# Allegro board ALTIROC2_EMULATOR_V2.brd
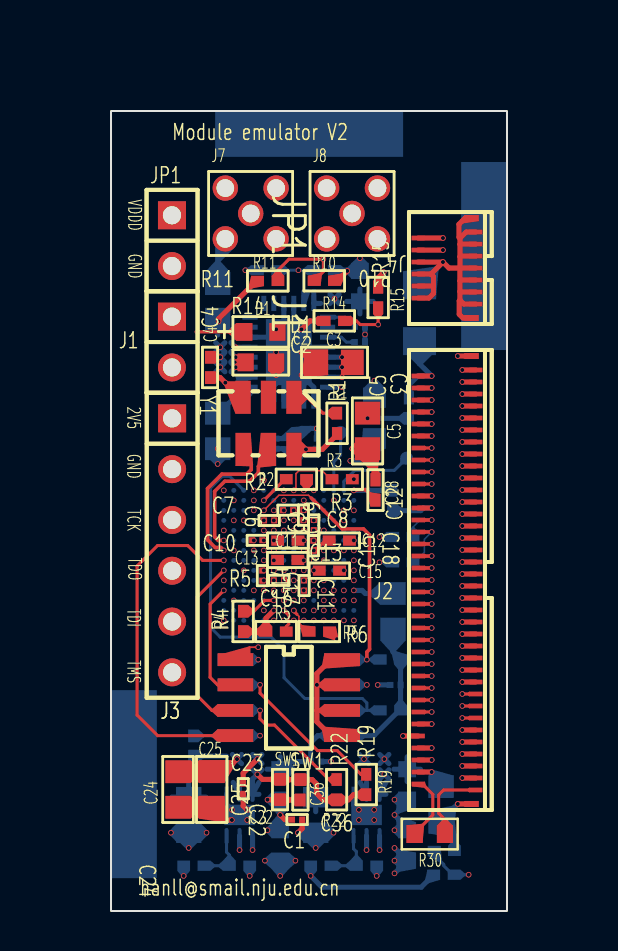
[diagram p0: board, top side]
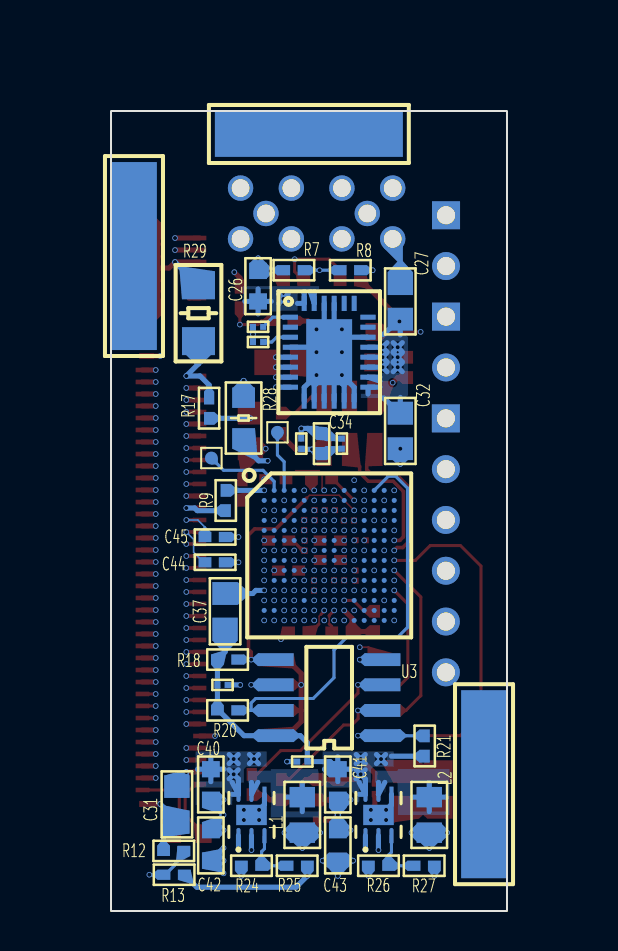
[diagram p1: board, bottom side, seen from below]

Outline 19.8 x 40 mm; copper layers: TOP, 02_GND, 03_SIG, 04_PWR, 05_PWR, 06_SIG, 07_GND, BOTTOM. Coordinates in mm from the lower left corner of the outline.
Outline path: rectangle 0,0 19.8,40

## Design rules (mm)
net group FAST_CMD: nets TIMING_DOUTN0 TIMING_DOUTP0
net group LPGBT_CK40: nets LPGBT_CK40N LPGBT_CK40P
net group LUMI0: nets FAST_CMDN FAST_CMDP
net group LUMI1: nets LUMI_DOUTN1 LUMI_DOUTP1
net group REFCLK: nets REFCLK_N REFCLK_P
net group TDR: nets TDR1 TDR2
net group TESTPIN: nets TESTPIN0 TESTPIN1
net group TIMING0: nets LUMI_DOUTN0 LUMI_DOUTP0
net group TIMING1: nets TIMING_DOUTN1 TIMING_DOUTP1
net group ASIC_ADD: nets ASIC_ADD<1> ASIC_ADD<2> ASIC_ADD<3>

## Placement (name value [footprint] x y rotation side)
C1  0.1u/0201  [SC0201]  9.3 4.57 180 top
C2  10u/0603  [SC0603]  7.49 27.43 180 top
C3  47u/0805  [SC0805]  11.18 27.43 180 top
C4  4.7u/0402  [SC0402]  4.95 27.18 90 top
C5  47u/0805  [SC0805]  12.83 24 90 top
C6  0.1u/0201  [SC0201]  8.85 20.04 180 top
C7  0.1u/0201  [SC0201]  7.91 19.53 0 top
C8  0.1u/0201  [SC0201]  9.62 19.79 90 top
C9  0.1u/0201  [SC0201]  10.14 19.3 90 top
C10  0.1u/0201  [SC0201]  7.31 18.54 180 top
C11  4.7u/0402  [SC0402]  8.84 18.52 0 top
C12  4.7u/0402  [SC0402]  11.41 18.52 180 top
C13  4.7u/0402  [SC0402]  8.83 17.55 0 top
C14  0.1u/0201  [SC0201]  7.56 16.77 90 top
C15  4.7u/0402  [SC0402]  10.92 17.02 180 top
C16  0.1u/0201  [SC0201]  8.39 16.54 180 top
C17  0.1u/0201  [SC0201]  9.65 16.27 270 top
C18  4.7u/0402  [SC0402]  13.23 21.04 90 top
C19  0.1u/0201  [SC0201]  10.12 18.26 90 top
C22  4.7u/0402  [SC0402]  8.45 6.07 90 top
C23  0.1u/0201  [SC0201]  6.61 6.11 270 top
C24  47u/0805  [SC0805]  3.35 6.08 270 top
C25  47u/0805  [SC0805]  5.04 6.08 270 top
C26  10u/0603  [SC0603]  12.45 31.24 270 bottom
C27  47u/0805  [SC0805]  5.33 30.48 90 bottom
C29  1n/0201  [SC0201]  12.45 29.21 180 bottom
C30  0.01u/0201  [SC0201]  12.45 28.45 180 bottom
C31  47u/0805  [SC0805]  16.5 5.33 270 bottom
C32  47u/0805  [SC0805]  5.33 24 270 bottom
C33  0.1u/0201  [SC0201]  10.29 23.37 270 bottom
C34  10u/0402  [SC0402]  9.27 23.37 270 bottom
C35  0.1u/0201  [SC0201]  8.26 23.37 90 bottom
C36  4.7u/0402  [SC0402]  9.47 6.06 90 top
C37  47u/0805  [SC0805]  14.1 14.99 270 bottom
C38  0.1u/0201  [SC0201]  14.22 11.3 0 bottom
C39  0.1u/0201  [SC0201]  10.24 7.47 0 bottom
C40  10u/0603  [SC0603]  14.81 6.33 90 bottom
C41  10u/0603  [SC0603]  8.46 6.33 90 bottom
C42  10u/0603  [SC0603]  14.81 3.28 270 bottom
C43  10u/0603  [SC0603]  8.46 3.28 270 bottom
C44  (0.01u/0402)  [SC0402]  14.59 17.43 180 bottom
C45  (0.01u/0402)  [SC0402]  14.59 18.7 180 bottom
D1  SML-310M/green0603  [SD0603-LED]  7.49 28.96 0 top
J1  2 HEADER  [SIP-2P]  3.05 25.91 270 top
J2  FH26W-71S-0.3SHW(60)  [FH26W-71S-UPDATE_ORIGIN]  16.8 16.55 180 top
J3  SIP6  [SIP-6P]  3.06 18.28 270 top
J4  FH26W-13S-0.3SHW(60)  [FH26W-13S-UPDATE_ORIGIN]  16.8 32.15 180 top
J5  -  [S1711-46R]  18.65 32.75 90 bottom
J6  -  [S1711-46R]  1.15 6.34 270 bottom
J7  (0734151471)  [MMCX5]  6.99 34.88 0 top
J8  (0734151471)  [MMCX5]  12.05 34.88 0 top
J9  -  [S1711-46R]  9.91 38.85 180 bottom
JP1  JUMPER2  [SIP-2P]  3.05 30.98 270 top
L1  BRC2012T2R2MD  [SL0805]  10.24 4.8 90 bottom
L2  BRC2012T2R2MD  [SL0805]  3.89 4.8 90 bottom
NOREF  -  []  16.8 20 90 top
NOREF#2  -  []  2.5 37 90 top
NOREF#3  -  []  16.8 16.55 90 top
NOREF#4  -  []  0 0 90 top
NOREF#5  -  []  0 40 0 top
NOREF#6  -  []  16.8 0 0 top
NOREF#7  -  []  2.5 40 0 top
R1  4.7k/0402  [SR0402]  11.3 24.38 90 top
R2  1K/0402  [SR0402]  9.27 21.59 0 top
R3  33/0402  [SR0402]  11.56 21.59 180 top
R4  330/0402  [SR0402]  6.6 14.48 90 top
R5  4.7k/0402  [SR0402]  8.26 13.97 0 top
R6  4.7k/0402  [SR0402]  10.41 13.97 180 top
R7  10k/0402  [SR0402]  10.66 32.04 180 bottom
R8  10k/0402  [SR0402]  7.83 32.04 180 bottom
R9  0/0402  [SR0402]  14.06 20.53 90 bottom
R10  10k/0402  [SR0402]  10.66 31.51 180 top
R11  10k/0402  [SR0402]  7.84 31.5 180 top
R12  10k/0402  [SR0402]  16.66 3 180 bottom
R13  10k/0402  [SR0402]  16.64 1.81 180 bottom
R14  10k/0402  [SR0402]  11.17 29.5 0 top
R15  10k/0402  [SR0402]  13.36 30.68 90 top
R17  0/0402  [SR0402]  14.89 25.14 90 bottom
R18  (4.7K/0402)  [SR0402]  13.97 12.57 0 bottom
R19  4.7k/0402  [SR0402]  12.76 6.32 270 top
R20  4.7k/0402  [SR0402]  13.97 10.03 0 bottom
R21  4.7k/0402  [SR0402]  4.11 8.25 270 bottom
R22  (4.7K/0402)  [SR0402]  11.28 6.07 270 top
R24  237k/0402  [SR0402]  12.78 2.26 0 bottom
R25  100k/0402  [SR0402]  10.49 2.26 0 bottom
R26  102k/0402  [SR0402]  6.43 2.26 0 bottom
R27  100k/0402  [SR0402]  4.14 2.26 0 bottom
R28  (0/0805)  [SR0805]  13.17 24.65 90 bottom
R29  (CHV1206-FX-1004ELF)  [SR1206]  15.43 29.89 270 bottom
R30  103KT1608T-1P  [SR0603]  15.94 3.85 180 top
SW1  A6H-4102  [SOP8-50-150]  8.89 10.67 270 top
TP1  TP1  [TP-SMD]  14.78 22.65 180 bottom
TP2  TP1  [TP-SMD]  11.48 23.93 180 bottom
U1  LT3070IUFD  [QFN_28_6_8]  8.89 27.94 180 bottom
U2  XC7S15-2CPGA196C  [BGA196-050-1414]  8.89 17.78 180 bottom
U3  MX25V8035FM1I  [SOP8-50-150]  8.89 10.67 90 bottom
U4  ADP1607ACPZN-R7  [QFN6_065]  12.78 4.8 90 bottom
U5  ADP1607ACPZN-R7  [QFN6_065]  6.43 4.8 90 bottom
Y1  511FBA200M000BAG  [SOSC6-0503]  7.87 24.38 270 top

## Library data of the parts
C1-C19 C22-C27 C29-C45 = CAP NP
D1 = LED
J1 = 4 HEADER_0
J2 = CONN SIMM 71
J3 = CON6
J4 = CONN SIMM 13
J5 J6 J9 = CONN SOCKET 1
J7 J8 = 0734151471
JP1 = JUMPER2_1
L1 L2 = INDUCTOR
R1-R15 R17-R22 R24-R29 = R
R30 = RESISTOR VAR 2
SW1 = SW DIP-4/SM_0
TP1 TP2 = TEST POINT
U1 = LT3070_0
U2 = XC7S15-2CPGA196C
U3 = MX25V8035FM1I
U4 U5 = ADP1607ACPZN-R7
Y1 = EG-2121CA

## Footprints (pads in the part's own frame, mm; a bottom-side part is the same pattern mirrored in y, then rotated)
BGA196-050-1414
  round 0.249 smd: A1(-3.251,3.251) A2(-2.751,3.251) A3(-2.25,3.251) A4(-1.75,3.251) A5(-1.25,3.251) A6(-0.749,3.251) A7(-0.249,3.251) A8(0.249,3.251) A9(0.749,3.251) A10(1.25,3.251) A11(1.75,3.251) A12(2.25,3.251) A13(2.751,3.251) A14(3.251,3.251) B1(-3.251,2.751) B2(-2.751,2.751) B3(-2.25,2.751) B4(-1.75,2.751) B5(-1.25,2.751) B6(-0.749,2.751) B7(-0.249,2.751) B8(0.249,2.751) B9(0.749,2.751) B10(1.25,2.751) B11(1.75,2.751) B12(2.25,2.751) B13(2.751,2.751) B14(3.251,2.751) C1(-3.251,2.25) C2(-2.751,2.25) C3(-2.25,2.25) C4(-1.75,2.25) C5(-1.25,2.25) C6(-0.749,2.25) C7(-0.249,2.25) C8(0.249,2.25) C9(0.749,2.25) C10(1.25,2.25) C11(1.75,2.25) C12(2.25,2.25) C13(2.751,2.25) C14(3.251,2.25) D1(-3.251,1.75) D2(-2.751,1.75) D3(-2.25,1.75) D4(-1.75,1.75) D5(-1.25,1.75) D6(-0.749,1.75) D7(-0.249,1.75) D8(0.249,1.75) D9(0.749,1.75) D10(1.25,1.75) D11(1.75,1.75) D12(2.25,1.75) D13(2.751,1.75) D14(3.251,1.75) E1(-3.251,1.25) E2(-2.751,1.25) E3(-2.25,1.25) E4(-1.75,1.25) E5(-1.25,1.25) E6(-0.749,1.25) E7(-0.249,1.25) E8(0.249,1.25) E9(0.749,1.25) E10(1.25,1.25) E11(1.75,1.25) E12(2.25,1.25) E13(2.751,1.25) E14(3.251,1.25) F1(-3.251,0.749) F2(-2.751,0.749) F3(-2.25,0.749) F4(-1.75,0.749) F5(-1.25,0.749) F6(-0.749,0.749) F7(-0.249,0.749) F8(0.249,0.749) F9(0.749,0.749) F10(1.25,0.749) F11(1.75,0.749) F12(2.25,0.749) F13(2.751,0.749) F14(3.251,0.749) G1(-3.251,0.249) G2(-2.751,0.249) G3(-2.25,0.249) G4(-1.75,0.249) G5(-1.25,0.249) G6(-0.749,0.249) G7(-0.249,0.249) G8(0.249,0.249) G9(0.749,0.249) G10(1.25,0.249) G11(1.75,0.249) G12(2.25,0.249) G13(2.751,0.249) G14(3.251,0.249) H1(-3.251,-0.249) H2(-2.751,-0.249) H3(-2.25,-0.249) H4(-1.75,-0.249) H5(-1.25,-0.249) H6(-0.749,-0.249) H7(-0.249,-0.249) H8(0.249,-0.249) H9(0.749,-0.249) H10(1.25,-0.249) H11(1.75,-0.249) H12(2.25,-0.249) H13(2.751,-0.249) H14(3.251,-0.249) J1(-3.251,-0.749) J2(-2.751,-0.749) J3(-2.25,-0.749) J4(-1.75,-0.749) J5(-1.25,-0.749) J6(-0.749,-0.749) J7(-0.249,-0.749) J8(0.249,-0.749) J9(0.749,-0.749) J10(1.25,-0.749) J11(1.75,-0.749) J12(2.25,-0.749) J13(2.751,-0.749) J14(3.251,-0.749) K1(-3.251,-1.25) K2(-2.751,-1.25) K3(-2.25,-1.25) K4(-1.75,-1.25) K5(-1.25,-1.25) K6(-0.749,-1.25) K7(-0.249,-1.25) K8(0.249,-1.25) K9(0.749,-1.25) K10(1.25,-1.25) K11(1.75,-1.25) K12(2.25,-1.25) K13(2.751,-1.25) K14(3.251,-1.25) L1(-3.251,-1.75) L2(-2.751,-1.75) L3(-2.25,-1.75) L4(-1.75,-1.75) L5(-1.25,-1.75) L6(-0.749,-1.75) L7(-0.249,-1.75) L8(0.249,-1.75) L9(0.749,-1.75) L10(1.25,-1.75) L11(1.75,-1.75) L12(2.25,-1.75) L13(2.751,-1.75) L14(3.251,-1.75) M1(-3.251,-2.25) M2(-2.751,-2.25) M3(-2.25,-2.25) M4(-1.75,-2.25) M5(-1.25,-2.25) M6(-0.749,-2.25) M7(-0.249,-2.25) M8(0.249,-2.25) M9(0.749,-2.25) M10(1.25,-2.25) M11(1.75,-2.25) M12(2.25,-2.25) M13(2.751,-2.25) M14(3.251,-2.25) N1(-3.251,-2.751) N2(-2.751,-2.751) N3(-2.25,-2.751) N4(-1.75,-2.751) N5(-1.25,-2.751) N6(-0.749,-2.751) N7(-0.249,-2.751) N8(0.249,-2.751) N9(0.749,-2.751) N10(1.25,-2.751) N11(1.75,-2.751) N12(2.25,-2.751) N13(2.751,-2.751) N14(3.251,-2.751) P1(-3.251,-3.251) P2(-2.751,-3.251) P3(-2.25,-3.251) P4(-1.75,-3.251) P5(-1.25,-3.251) P6(-0.749,-3.251) P7(-0.249,-3.251) P8(0.249,-3.251) P9(0.749,-3.251) P10(1.25,-3.251) P11(1.75,-3.251) P12(2.25,-3.251) P13(2.751,-3.251) P14(3.251,-3.251)
FH26W-13S-UPDATE_ORIGIN
  rect 0.66x0.231 smd: 1(-1.438,-1.801) 2(1.438,-1.501) 3(-1.438,-1.199) 4(1.438,-0.899) 5(-1.438,-0.599) 6(1.438,-0.3) 7(-1.438,0) 8(1.438,0.3) 9(-1.438,0.599) 10(1.438,0.899) 11(-1.438,1.199) 12(1.438,1.501) 13(-1.438,1.801)
  rect 0.711x0.3 smd: 14(-1.237,-2.499) 15(-1.237,2.499)
FH26W-71S-UPDATE_ORIGIN
  rect 0.66x0.231 smd: 1(-1.438,-10.5) 2(1.438,-10.201) 3(-1.438,-9.901) 4(1.438,-9.601) 5(-1.438,-9.299) 6(1.438,-8.999) 7(-1.438,-8.7) 8(1.438,-8.4) 9(-1.438,-8.1) 10(1.438,-7.8) 11(-1.438,-7.501) 12(1.438,-7.201) 13(-1.438,-6.901) 14(1.438,-6.599) 15(-1.438,-6.299) 16(1.438,-5.999) 17(-1.438,-5.7) 18(1.438,-5.4) 19(-1.438,-5.1) 20(1.438,-4.801) 21(-1.438,-4.501) 22(1.438,-4.201) 23(-1.438,-3.899) 24(1.438,-3.599) 25(-1.438,-3.299) 26(1.438,-3) 27(-1.438,-2.7) 28(1.438,-2.4) 29(-1.438,-2.101) 30(1.438,-1.801) 31(-1.438,-1.501) 32(1.438,-1.199) 33(-1.438,-0.899) 34(1.438,-0.599) 35(-1.438,-0.3) 36(1.438,0) 37(-1.438,0.3) 38(1.438,0.599) 39(-1.438,0.899) 40(1.438,1.199) 41(-1.438,1.501) 42(1.438,1.801) 43(-1.438,2.101) 44(1.438,2.4) 45(-1.438,2.7) 46(1.438,3) 47(-1.438,3.299) 48(1.438,3.599) 49(-1.438,3.899) 50(1.438,4.201) 51(-1.438,4.501) 52(1.438,4.801) 53(-1.438,5.1) 54(1.438,5.4) 55(-1.438,5.7) 56(1.438,5.999) 57(-1.438,6.299) 58(1.438,6.599) 59(-1.438,6.901) 60(1.438,7.201) 61(-1.438,7.501) 62(1.438,7.8) 63(-1.438,8.1) 64(1.438,8.4) 65(-1.438,8.7) 66(1.438,8.999) 67(-1.438,9.299) 68(1.438,9.601) 69(-1.438,9.901) 70(1.438,10.201) 71(-1.438,10.5)
  rect 0.711x0.3 smd: 72(-1.237,-11.199) 73(-1.237,11.199)
MMCX5
  round 1.27 hole 0.889: 1(0,0) 2(1.27,1.27) 3(1.27,-1.27) 4(-1.27,-1.27) 5(-1.27,1.27)
QFN6_065
  custom 0.762x0.203 smd: 1(-1.031,0.65) 2(-1.031,0) 3(-1.031,-0.65) 4(1.031,-0.65) 5(1.031,0) 6(1.031,0.65)
  rect 1.016x1.524 smd: 7(0,0)
QFN_28_6_8
  rect 0.759x0.249 smd: 1(-1.941,1.75) 2(-1.941,1.25) 3(-1.941,0.749) 4(-1.941,0.249) 5(-1.941,-0.249) 6(-1.941,-0.749) 7(-1.941,-1.25) 8(-1.941,-1.75) 15(1.941,-1.75) 16(1.941,-1.25) 17(1.941,-0.749) 18(1.941,-0.249) 19(1.941,0.249) 20(1.941,0.749) 21(1.941,1.25) 22(1.941,1.75)
  rect 0.249x0.759 smd: 9(-1.25,-2.441) 10(-0.749,-2.441) 11(-0.249,-2.441) 12(0.249,-2.441) 13(0.749,-2.441) 14(1.25,-2.441) 23(1.25,2.441) 24(0.749,2.441) 25(0.249,2.441) 26(-0.249,2.441) 27(-0.749,2.441) 28(-1.25,2.441)
  rect 2.291x3.299 smd: 29(0,0)
S1711-46R
  rect 9.398x2.286 smd: 1(0,0)
SC0201
  rect 0.3x0.3 smd: 1(-0.254,0) 2(0.254,0)
SC0402
  rect 0.64x0.511 smd: 1(-0.508,0) 2(0.508,0)
SC0603
  rect 0.81x0.889 smd: 1(-0.762,0) 2(0.762,0)
SC0805
  rect 1.14x1.27 smd: 1(-0.889,0) 2(0.889,0)
SD0603-LED
  rect 0.81x0.889 smd: 1(-0.826,0) 2(0.826,0)
SIP-2P
  rect 1.4x1.4 hole 0.909: 1(-3.81,0)
  round 1.4 hole 0.909: 2(-1.27,0)
SIP-6P
  rect 1.4x1.4 hole 0.909: 1(-6.35,0)
  round 1.4 hole 0.909: 2(-3.81,0) 3(-1.27,0) 4(1.27,0) 5(3.81,0) 6(6.35,0)
SL0805
  rect 1.021x1.27 smd: 1(-0.889,0) 2(0.889,0)
SOP8-50-150
  rect 0.64x1.781 smd: 1(-1.9,-2.67) 2(-0.64,-2.67) 3(0.64,-2.67) 4(1.9,-2.67) 5(1.9,2.67) 6(0.64,2.67) 7(-0.64,2.67) 8(-1.9,2.67)
SOSC6-0503
  rect 1.651x0.762 smd: 1(-1.3,1.27) 2(-1.3,0) 3(-1.3,-1.27) 4(1.3,-1.27) 5(1.3,0) 6(1.3,1.27)
SR0402
  rect 0.64x0.511 smd: 1(-0.508,0) 2(0.508,0)
SR0603
  rect 0.81x0.889 smd: 1(-0.762,0) 2(0.762,0)
SR0805
  rect 1.021x1.14 smd: 1(-1.016,0) 2(1.016,0)
SR1206
  rect 1.4x1.651 smd: 1(-1.397,0) 2(1.397,0)
TP-SMD
  round 0.64 smd: 1(0,0)

## Nets
1V0: C2.2 C4.2 C6.1 C11.2 C13.2 C16.1 C17.1 C27.1 C32.1 R11.2 U1.15(OUT1) U1.16(OUT2) U1.17(OUT3) U1.18(OUT4) U1.19(SENSE) U2.C7(VCCBRAM#C7) U2.C9(VCCBRAM#C9) U2.E7(VCCINT#E7) U2.E9(VCCINT#E9) U2.F6(VCCINT#F6) U2.G9(VCCINT#G9) U2.H6(VCCINT#H6) U2.J9(VCCINT#J9) U2.K6(VCCINT#K6) U2.K8(VCCINT#K8)
1V8: C5.1 C7.1 C8.1 C18.2 C40.2 R13.2 R25.1 U2.D6(VCCAUX#D6) U2.D8(VCCAUX#D8) U2.D10(VCCAUX#D10) U4.6(VOUT)
2V5: C10.1 C14.1 C22.2 C23.1 C24.1 C25.1 C26.2 C33.2 C34.2 C35.1 C36.2 C37.2 C38.2 C39.1 C41.2 J3.1 R1.1 R4.1 R5.1 R6.1 R18.2 R19.2 R20.2 R21.2 R22.2 R27.1 U1.27(BIAS) U1.28(EN) U2.F10(VCCO_14#F10) U2.H10(VCCO_14#H10) U2.K10(VCCO_14#K10) U2.L10(M0_0) U2.N6(VCCO_0#N6) U2.N9(CFGBVS_0) U2.P8(VCCO_0#P8) U3.8(VCC) U5.6(VOUT) Y1.6(VCC)
GND: C1.2 C2.1 C3.2 C4.1 C5.2 C6.2 C7.2 C8.2 C9.2 C10.2 C11.1 C12.1 C13.1 C14.2 C15.1 C16.2 C17.2 C18.1 C19.2 C22.1 C23.2 C24.2 C25.2 C26.1 C27.2 C29.1 C30.1 C31.2 C32.2 C33.1 C34.1 C35.2 C36.1 C37.1 C38.1 C39.2 C40.1 C41.1 C42.1 C43.1 D1.2(CATHODE) J2.31 J2.33 J2.35 J2.37 J2.39 J2.41 J2.43 J2.45 J2.47 J2.49 J2.51 J2.53 J2.73 J3.2 J7.2(GND#2) J7.3(GND#3) J7.4(GND#4) J7.5(GND#5) J8.2(GND#2) J8.3(GND#3) J8.4(GND#4) J8.5(GND#5) JP1.2 R2.2 R7.1 R9.2 R10.1 R12.1 R14.1 R17.1 R24.2 R26.2 SW1.5(A5) SW1.6(A6) SW1.7(A7) SW1.8(A8) U1.4(GND#4) U1.9(GND#9) U1.10(GND#10) U1.11(GND#11) U1.12(GND#12) U1.13(GND#13) U1.14(GND#14) U1.20(GND#20) U1.25(VO2) U1.26(GND#26) U1.29(PAD) U2.A1(GND#A1) U2.A6(GND#A6) U2.A11(GND#A11) U2.A14(GND#A14) U2.B3(GND#B3) U2.B8(GND#B8) U2.B13(GND#B13) U2.C6(GND#C6) U2.C8(GND#C8) U2.D2(GND#D2) U2.D5(GND#D5) U2.D7(GND#D7) U2.D9(GND#D9) U2.D12(GND#D12) U2.E4(GND#E4) U2.E6(GND#E6) U2.E8(GND#E8) U2.E10(GND#E10) U2.E14(GND#E14) U2.F1(GND#F1) U2.F5(GND#F5) U2.F9(GND#F9) U2.F11(GND#F11) U2.G3(GND#G3) U2.G6(GND#G6) U2.G10(GND#G10) U2.G11(GND#G11) U2.G13(GND#G13) U2.H5(GND#H5) U2.H9(GND#H9) U2.J2(GND#J2) U2.J6(GND#J6) U2.J7(DXN_0) U2.J8(DXP_0) U2.J10(GND#J10) U2.J12(GND#J12) U2.K4(GND#K4) U2.K5(GND#K5) U2.K7(GND#K7) U2.K9(GND#K9) U2.K14(GND#K14) U2.L1(GND#L1) U2.L5(GND#L5) U2.L6(GND#L6) U2.L8(M1_0) U2.L9(M2_0) U2.L11(GND#L11) U2.M3(GND#M3) U2.M8(GND#M8) U2.M13(GND#M13) U2.N5(GND#N5) U2.N10(GND#N10) U2.P1(GND#P1) U2.P5(GND#P5) U2.P6(GND#P6) U2.P7(GND#P7) U2.P9(GND#P9) U2.P14(GND#P14) U3.4(GND) U4.4(GND) U4.7(EPAD) U5.4(GND) U5.7(EPAD) Y1.3(GND)
GND_EARTH: J2.1 J2.2 J2.72 R17.2 R29.2
GND_SIGNAL: J2.13 J2.15 J2.17 J2.19 J2.21 J2.22 J2.23 J2.24 J2.25 J2.27 J2.29 R9.1
VDDA: C3.1 J2.3 J2.4 J2.5 J2.6 J2.7 J2.8 J2.9 J2.10 J2.11 J2.12 R15.2 R28.2 U1.5(IN1) U1.6(IN2) U1.7(IN3) U1.8(IN4)
VDDD: C1.1 C9.1 C12.2 C15.2 C19.1 C31.1 C42.2 C43.2 J2.60 J2.61 J2.62 J2.63 J2.64 J2.65 J2.66 J2.67 J2.68 J2.69 JP1.1 L1.1 L2.1 R8.2 R28.1 U2.E5(VCCO_34#E5) U2.G5(VCCO_34#G5) U2.J5(VCCO_34#J5) U4.1(VIN) U4.2(EN) U5.1(VIN) U5.2(EN)
ASIC_ADD<1>: J2.57 U2.L4(IO_L19P_T3_34)
ASIC_ADD<2>: J2.56 U2.L3(IO_L19N_T3_VREF_34)
ASIC_ADD<3>: J2.55 U2.L2(IO_L17P_T2_34)
DIPSW0: SW1.4(A4) U2.H14(IO_L15N_T2_DQS_DOUT_CSO_B_14)
DIPSW1: SW1.3(A3) U2.J14(IO_L15P_T2_DQS_RDWR_B_14)
DIPSW2: SW1.2(A2) U2.L14(IO_L17N_T2_D29_14)
FAST_CMDN: J2.44 U2.M2(IO_L20P_T3_34)
FAST_CMDP: J2.42 U2.M1(IO_L20N_T3_34)
FLASH_S7_CLK: R3.1 U3.6(SCLK)
FLASH_S7_CS_B: R21.1 U2.D13(IO_L6P_T0_FCS_B_14) U3.1(NCS)
FLASH_S7_D0: R18.1 U2.C10(IO_L1P_T0_D00_MOSI_14) U3.5(SI/SIO0)
FLASH_S7_D1: R22.1 U2.C11(IO_L1N_T0_D01_DIN_14) U3.2(SO/SIO1)
FLASH_S7_D2: R19.1 U2.B11(IO_L2P_T0_D02_14) U3.3(NWP/SIO2)
FLASH_S7_D3: R20.1 U2.A12(IO_L2N_T0_D03_14) U3.7(NHOLD/SIO3)
HV: J4.1 J4.2 J4.3 J4.4 J4.5 J4.6 J4.7 J4.8 J4.9 J4.10 J4.11 J4.12 J4.13 J4.14 J4.15 R29.1
I2C_SCL: J2.59 U2.P4(IO_L22P_T3_34)
I2C_SDA: J2.58 U2.N3(IO_L22N_T3_34)
LPGBT_CK40N: J2.32 U2.G1(IO_L12N_T1_MRCC_34)
LPGBT_CK40P: J2.30 U2.G2(IO_L12P_T1_MRCC_34)
LPGBT_CK320N: C45.2 U2.G4(IO_L13N_T2_MRCC_34)
LPGBT_CK320P: C44.2 U2.H4(IO_L13P_T2_MRCC_34)
LPGBT_HARD_RSTB: J2.54 SW1.1(A1) U2.K1(IO_L17N_T2_34)
LUMI_DOUTN0: J2.40 U2.J1(IO_L15P_T2_DQS_34)
LUMI_DOUTN1: J2.52 U2.M4(IO_L24N_T3_34)
LUMI_DOUTP0: J2.38 U2.H1(IO_L15N_T2_DQS_34)
LUMI_DOUTP1: J2.50 U2.N4(IO_L24P_T3_34)
MONITORING_PROBE0: J2.16 R12.2 R13.1
MONITORING_PROBE1: J2.14 R10.2 R11.1
MONITORING_VDDA: J2.18 R14.2 R15.1
MONITORING_VDDD: J2.20 R7.2 R8.1
NTC+: J2.70 R30.2
NTC-: J2.71 R30.1
REFCLK_N: U2.F14(IO_L12N_T1_MRCC_14) Y1.5(O\U\T\)
REFCLK_P: U2.G14(IO_L12P_T1_MRCC_14) Y1.4(OUT)
S7_DONE: D1.1(ANODE) R4.2 U2.M9(DONE_0)
S7_INIT_B: R6.2 U2.N7(INIT_B_0)
S7_PROG_B: R5.2 U2.N8(PROGRAM_B_0)
S7_TCK: J3.3 U2.A8(TCK_0)
S7_TDI: J3.5 U2.M7(TDI_0)
S7_TDO: J3.4 U2.M6(TDO_0)
S7_TMS: J3.6 U2.L7(TMS_0)
TDR1: C44.1 J2.28 J7.1(SIG)
TDR2: C45.1 J2.26 J8.1(SIG)
TESTPIN0: J1.1 U2.B6(IO_L4P_T0_34)
TESTPIN1: J1.2 U2.A5(IO_L4N_T0_34)
TIMING_DOUTN0: J2.36 U2.C1(IO_L7N_T1_34)
TIMING_DOUTN1: J2.48 U2.P3(IO_L23P_T3_34)
TIMING_DOUTP0: J2.34 U2.C2(IO_L7P_T1_34)
TIMING_DOUTP1: J2.46 U2.P2(IO_L23N_T3_34)
N16713570: R2.1 U2.B10(IO_L3P_T0_DQS_PUDC_B_14)
N16721215: R1.2 Y1.1(OE)
N16850550: R24.1 R25.2 U4.3(FB)
N16851375: L1.2 U4.5(SW)
N16854290: R26.1 R27.2 U5.3(FB)
N16854304: L2.2 U5.5(SW)
N16863002: C30.2 U1.3(REF/BYP)
N16863083: C29.2 U1.1(VIOC)
N17053331: TP1.1 U2.A2(IO_L1N_T0_34)
N17053348: TP2.1 U2.A3(IO_L1P_T0_34)
N166943472: R3.2 U2.A7(CCLK_0)

Pads without a net: J5 1; J6 1; J9 1; U1 2 21 22 23 24; U2 A4 A9 A10 A13 B1 B2 B4 B5 B7 B9 B12 B14 C3 C4 C5 C12 C13 C14 D1 D3 D4 D11 D14 E1 E2 E3 E11 E12 E13 F2 F3 F4 F7 F8 F12 F13 G7 G8 G12 H2 H3 H7 H8 H11 H12 H13 J3 J4 J11 J13 K2 K3 K11 K12 K13 L12 L13 M5 M10 M11 M12 M14 N1 N2 N11 N12 N13 N14 P10 P11 P12 P13; Y1 2

## Via types
v1: diameter 0.279, hole 0.203, TOP to BOTTOM, 287 vias

## Routing (per net, layer and track width the routed paths; a pad name or vN(x,y) marks a point on that pad's centre or on a via; arc(x,y) is an arc through that point)
1V0: length 38
  TOP w0.254: v1(5.46,27.69) 5.46,27.69 C4.2 ; v1(5.38,29.48) 5.38,29.61 7.27,31.5 R11.2 ; v1(6.23,27.69) 6.47,27.69 C2.2 6.49,27.19 v1(6.23,27.19)
  05_PWR w0.254: v1(6.23,27.69) 6.45,27.92 ; v1(6.23,27.69) 6,27.46 ; v1(6.23,27.69) 6,27.92 ; v1(6.23,27.69) 6.45,27.46 ; 6,27.96 v1(6.23,28.19) ; v1(6.23,28.19) 6,28.42 ; v1(6.23,28.19) 6.45,28.42 ; v1(6.23,28.19) 6.45,27.96 ; 5.23,27.46 v1(5.46,27.69) ; v1(5.46,27.69) 5.69,27.92 ; v1(5.46,27.69) 5.23,27.92 ; v1(5.46,27.69) 5.69,27.46 ; 9.41,17.3 v1(9.64,17.53) 9.41,17.76 ; 8.91,20.26 v1(9.14,20.03) ; v1(9.14,20.03) 9.37,20.26 ; v1(9.14,20.03) 9.37,19.8 ; v1(9.14,20.03) 8.91,19.8 ; 7.91,18.26 v1(8.14,18.03) ; v1(8.14,18.03) 8.37,17.8 ; v1(8.14,18.03) 8.37,18.26 ; v1(8.14,18.03) 7.91,17.8 ; 8.91,18.8 v1(9.14,19.03) ; v1(9.14,19.03) 9.37,18.8 ; v1(9.14,19.03) 9.37,19.26 ; v1(9.14,19.03) 8.91,19.26 ; v1(8.64,16.53) 8.87,16.76 ; v1(8.64,16.53) 8.41,16.76 ; v1(8.64,16.53) 8.41,16.3 ; v1(8.64,16.53) 8.87,16.3 ; v1(5.46,27.19) 5.69,26.96 ; v1(5.46,27.19) 5.23,27.42 ; v1(5.46,27.19) 5.23,26.96 ; v1(5.46,27.19) 5.69,27.42 ; 5.23,27.96 v1(5.46,28.19) ; v1(5.46,28.19) 5.23,28.42 ; v1(5.46,28.19) 5.69,28.42 ; v1(5.46,28.19) 5.69,27.96 ; v1(8.14,20.03) 8.37,20.26 ; v1(8.14,20.03) 8.37,19.8 ; v1(8.14,20.03) 7.91,20.26 ; v1(8.14,20.03) 7.91,19.8 ; 7.91,17.26 v1(8.14,17.03) ; v1(8.14,17.03) 7.91,16.8 ; v1(8.14,17.03) 8.37,16.8 ; v1(8.14,17.03) 8.37,17.26 ; 9.41,18.3 v1(9.64,18.53) 9.41,18.76 ; 5.61,29.25 v1(5.38,29.48) 5.15,29.25 ; 6,26.96 v1(6.23,27.19) ; v1(6.23,27.19) 6,27.42 ; v1(6.23,27.19) 6.45,26.96 ; v1(6.23,27.19) 6.45,27.42 ; v1(8.14,19.03) 8.37,18.8 ; v1(8.14,19.03) 7.91,19.26 ; v1(8.14,19.03) 7.91,18.8 ; v1(8.14,19.03) 8.37,19.26 ; 9.41,16.3 v1(9.64,16.53) 9.41,16.76
  BOTTOM w0.254: 5.23,26.96 v1(5.46,27.19) ; v1(5.46,27.19) 5.23,27.42 ; v1(5.46,27.19) 5.69,26.96 ; v1(5.46,27.19) 5.69,27.42 ; 6.95,25.85 U1.15 6.35,26.19 ; 5.23,28.42 v1(5.46,28.19) ; v1(5.46,28.19) 5.23,27.96 ; v1(5.46,28.19) 5.69,28.42 ; v1(5.46,28.19) 5.69,27.96 ; U1.19 v1(6.23,28.19) ; v1(6.23,28.19) 6,27.96 ; v1(6.23,28.19) 6,28.42 ; 6,27.46 v1(6.23,27.69) ; v1(6.23,27.69) 6,27.92 ; v1(6.23,27.69) U1.18 ; 6.35,26.69 U1.16 6.35,26.49 ; 6,27.42 v1(6.23,27.19) ; v1(6.23,27.19) U1.17 ; v1(6.23,27.19) 6,26.96 ; 5.33,28.8 C27.1 6.18,28.83 ; 5.33,25.68 C32.1 6.18,25.66 ; 5.23,27.92 v1(5.46,27.69) ; v1(5.46,27.69) 5.23,27.46 ; v1(5.46,27.69) 5.69,27.92 ; v1(5.46,27.69) 5.69,27.46
1V8: length 27.6
  TOP w0.178: C5.1 13.23,22.72 C18.2
  TOP w0.254: C5.1 v1(12.06,23.11)
  04_PWR w0.254: 7.41,21.31 v1(7.64,21.54) ; v1(7.64,21.54) 7.87,21.31 ; v1(7.64,21.54) 7.87,21.77 ; v1(7.64,21.54) 7.41,21.77 ; 9.75,1.53 v1(9.98,1.76) ; v1(9.98,1.76) 9.75,1.98 ; v1(9.98,1.76) 10.21,1.53 ; v1(9.98,1.76) 10.21,1.98 ; 13.44,7.06 v1(13.67,6.84) ; v1(13.67,6.84) 13.89,6.61 ; v1(13.67,6.84) 13.89,7.06 ; v1(13.67,6.84) 13.44,6.61 ; 13.44,7.83 v1(13.67,7.6) ; v1(13.67,7.6) 13.44,7.37 ; v1(13.67,7.6) 13.89,7.37 ; v1(13.67,7.6) 13.89,7.83 ; v1(12.65,7.6) 12.88,7.83 ; v1(12.65,7.6) 12.88,7.37 ; v1(12.65,7.6) 12.42,7.83 ; v1(12.65,7.6) 12.42,7.37 ; 7.87,19.76 v1(7.64,19.53) 7.41,19.76 ; 8.87,19.76 v1(8.64,19.53) 8.41,19.76 ; v1(12.06,23.11) 12.29,23.34 ; v1(12.06,23.11) 11.84,22.89 ; v1(12.06,23.11) 11.84,23.34 ; v1(12.06,23.11) 12.29,22.89 ; 9.41,19.76 v1(9.64,19.53) 9.87,19.76
  BOTTOM w0.254: U4.6 13.74,6.43 ; U4.6 13.74,5.83 ; U4.6 13.43,6.6 v1(13.67,6.84) ; 12.42,7.83 v1(12.65,7.6) ; v1(12.65,7.6) 12.42,7.37 ; v1(12.65,7.6) 12.88,7.37 ; v1(12.65,7.6) 12.88,7.83 ; v1(13.67,6.84) 13.89,7.06 ; v1(13.67,6.84) 13.89,6.61 ; v1(13.67,6.84) 13.44,7.06 ; v1(13.67,7.6) 13.89,7.37 ; v1(13.67,7.6) 13.89,7.83 ; v1(13.67,7.6) 13.44,7.83 ; v1(13.67,7.6) 13.44,7.37 ; R25.1 v1(9.98,1.76) 10.55,1.19 15.51,1.19 16.13,1.81 R13.2 ; 14.81,6.47 C40.2 ; C40.2 14.81,7.71 ; C40.2 14.15,7.09 ; C40.2 15.47,7.09
2V5: length 78.7
  TOP w0.254: v1(8.14,15.03) 7.75,14.64 R5.1 R4.1 ; R1.1 11.3,23.81 10.57,23.08 v1(9.75,23.08) Y1.6 ; R6.1 v1(11.3,13.59) ; C24.1 5.03,6.96 C25.1 5.67,6.97 v1(6.3,7.6) ; v1(7.32,6.84) 7.57,6.58 C22.2 8.47,6.57 C36.2 10.06,6.57 10.28,6.35 10.28,5.88 10.6,5.56 R22.2 11.87,5.56 12.13,5.82 R19.2 ; C23.1 6.61,6.89 v1(7.32,7.6)
  04_PWR w0.254: v1(8.64,14.53) 8.87,14.3 ; v1(8.64,14.53) 8.41,14.76 ; v1(8.64,14.53) 8.87,14.76 ; v1(8.64,14.53) 8.41,14.3 ; v1(7.64,18.53) 7.87,18.76 ; v1(7.64,18.53) 7.41,18.3 ; v1(7.64,18.53) 7.87,18.3 ; v1(7.64,18.53) 7.41,18.76 ; v1(11.3,13.59) 11.53,13.82 ; v1(11.3,13.59) 11.53,13.36 ; v1(11.3,13.59) 11.07,13.82 ; v1(11.3,13.59) 11.07,13.36 ; 9.52,23.31 v1(9.75,23.08) ; v1(9.75,23.08) 9.98,23.31 ; v1(9.75,23.08) 9.98,22.85 ; v1(9.75,23.08) 9.52,22.85 ; v1(7.32,7.6) 7.54,7.37 ; v1(7.32,7.6) 7.09,7.37 ; v1(7.32,7.6) 7.54,7.83 ; v1(7.32,7.6) 7.09,7.83 ; v1(11.18,30.61) 11.4,30.38 ; v1(11.18,30.61) 10.95,30.38 ; v1(11.18,30.61) 10.95,30.84 ; v1(11.18,30.61) 11.4,30.84 ; v1(7.64,16.03) 7.87,15.8 ; v1(7.64,16.03) 7.41,15.8 ; v1(7.64,16.03) 7.87,16.26 ; v1(7.64,16.03) 7.41,16.26 ; 3.4,1.98 v1(3.63,1.76) ; v1(3.63,1.76) 3.86,1.98 ; v1(3.63,1.76) 3.4,1.53 ; v1(3.63,1.76) 3.86,1.53 ; 7.91,14.8 v1(8.14,15.03) ; v1(8.14,15.03) 7.91,15.26 ; v1(8.14,15.03) 8.37,14.8 ; v1(8.14,15.03) 8.37,15.26 ; 7.41,16.3 v1(7.64,16.53) ; v1(7.64,16.53) 7.41,16.76 ; v1(7.64,16.53) 7.87,16.3 ; v1(7.64,16.53) 7.87,16.76 ; 7.09,6.61 v1(7.32,6.84) ; v1(7.32,6.84) 7.54,6.61 ; v1(7.32,6.84) 7.54,7.06 ; v1(7.32,6.84) 7.09,7.06 ; 9.41,15.26 v1(9.64,15.03) ; v1(9.64,15.03) 9.87,14.8 ; v1(9.64,15.03) 9.87,15.26 ; v1(9.64,15.03) 9.41,14.8 ; 7.41,17.76 v1(7.64,17.53) ; v1(7.64,17.53) 7.41,17.3 ; v1(7.64,17.53) 7.87,17.3 ; v1(7.64,17.53) 7.87,17.76 ; 2.4,23.97 J3.1 ; J3.1 2.4,25.29 ; J3.1 3.72,25.29 ; J3.1 3.72,23.97 ; v1(6.3,7.6) 6.53,7.83 ; v1(6.3,7.6) 6.53,7.37 ; v1(6.3,7.6) 6.07,7.83 ; v1(6.3,7.6) 6.07,7.37
  05_PWR w0.254: v1(6.3,7.6) 6.53,7.83 ; v1(6.3,7.6) 6.07,7.37 ; v1(6.3,7.6) 6.07,7.83 ; v1(6.3,7.6) 6.53,7.37 ; v1(7.32,6.84) 7.54,6.61 ; v1(7.32,6.84) 7.09,7.06 ; v1(7.32,6.84) 7.54,7.06 ; v1(7.32,6.84) 7.09,6.61 ; 9.41,15.26 v1(9.64,15.03) ; v1(9.64,15.03) 9.87,14.8 ; v1(9.64,15.03) 9.87,15.26 ; v1(9.64,15.03) 9.41,14.8 ; 7.41,15.8 v1(7.64,16.03) 7.87,15.8 ; 7.91,15.26 v1(8.14,15.03) ; v1(8.14,15.03) 7.91,14.8 ; v1(8.14,15.03) 8.37,15.26 ; v1(8.14,15.03) 8.37,14.8 ; v1(7.32,7.6) 7.54,7.37 ; v1(7.32,7.6) 7.09,7.37 ; v1(7.32,7.6) 7.54,7.83 ; v1(7.32,7.6) 7.09,7.83 ; v1(8.64,14.53) 8.87,14.3 ; v1(8.64,14.53) 8.87,14.76 ; v1(8.64,14.53) 8.41,14.76 ; v1(8.64,14.53) 8.41,14.3 ; v1(11.3,13.59) 11.53,13.82 ; v1(11.3,13.59) 11.07,13.36 ; v1(11.3,13.59) 11.53,13.36 ; v1(11.3,13.59) 11.07,13.82
  BOTTOM w0.254: 10.95,30.84 v1(11.18,30.61) ; v1(11.18,30.61) 11.4,30.84 ; v1(11.18,30.61) 11.4,30.38 ; v1(11.18,30.61) 10.95,30.38 ; 10.14,30.98 U1.28 10.48,30.38 ; v1(6.3,7.6) 6.53,7.83 ; v1(6.3,7.6) 6.53,7.37 ; v1(6.3,7.6) 6.07,7.37 ; v1(6.3,7.6) 6.07,7.83 ; R21.2 5.78,7.74 ; 12.45,29.86 C26.2 ; C26.2 11.79,30.48 ; C26.2 13.11,30.48 ; C26.2 12.45,31.1 ; 7.09,7.06 v1(7.32,6.84) ; v1(7.32,6.84) 7.54,6.61 ; v1(7.32,6.84) 7.54,7.06 ; v1(7.32,6.84) 7.08,6.6 U5.6 ; R27.1 v1(3.63,1.76) ; 9.12,7.09 C41.2 ; C41.2 8.46,6.47 ; C41.2 7.8,7.09 ; C41.2 8.46,7.71 ; C41.2 8.84,7.47 C39.1 9.98,8.41 10.34,8.77 U3.8 13.15,8.77 14.41,10.03 R20.2 C38.2 R18.2 14.1,12.95 14.1,14.1 ; v1(7.32,7.6) 7.54,7.37 ; v1(7.32,7.6) 7.09,7.37 ; v1(7.32,7.6) 7.54,7.83 ; v1(7.32,7.6) 7.09,7.83 ; 9.83,30.98 U1.27 9.64,30.98 ; U5.6 7.39,6.43 ; U5.6 7.39,5.83 ; C33.2 10.26,23.08 v1(9.75,23.08) 9.53,22.86 C34.2 9.02,23.11 C35.1
GND: length 400.9
  TOP w0.178: C18.1 13.23,20.57 12.72,21.07 12.18,21.07 v1(12.14,21.03)
  TOP w0.254: v1(7.82,5.57) C22.1 8.47,5.55 C36.1 ; J2.53 v1(17.56,11.45) ; SW1.7 v1(10.29,11.31) ; v1(10.29,11.31) 10.29,11.87 10.99,12.57 SW1.8 ; v1(10.29,11.31) 10.29,10.03 ; J2.49 v1(17.56,12.65) ; v1(11.81,32) 11.32,31.51 R10.1 ; C23.2 6.61,5.26 v1(6.81,5.06) ; J2.35 v1(17.56,16.85) ; SW1.6 10.3,10.03 10.29,10.03 ; J2.45 v1(17.56,13.85) ; J2.41 v1(17.56,15.05) ; J2.39 v1(17.56,15.65) ; v1(8.46,4.8) 8.69,4.57 C1.2 ; J2.43 v1(17.56,14.45) ; v1(9.53,26.8) 9.65,26.8 C3.2 9.78,27.94 v1(9.53,27.94) ; C2.1 v1(8.26,26.8) ; C4.1 5.46,26.67 v1(5.71,26.42) 6.45,25.68 Y1.3 ; v1(9.53,29.08) 9.95,29.5 R14.1 ; J2.73 v1(17.34,5.35) ; SW1.5 10.99,8.77 10.29,9.46 10.29,10.03 ; R2.2 9.78,21.17 v1(9.64,21.03) ; J2.51 v1(17.56,12.05) ; C24.2 5.03,5.19 C25.2 5.68,4.55 v1(6.05,4.55) ; J2.31 v1(17.56,18.05) ; J2.33 v1(17.56,17.45) ; J2.47 v1(17.56,13.25) ; J2.37 v1(17.56,16.25)
  02_GND w0.254: 10.17,36.76 J8.5 ; J8.5 11.4,36.76 ; J8.5 10.17,35.53 ; 11.91,14.76 v1(12.14,14.53) ; v1(12.14,14.53) 12.37,14.76 ; v1(12.14,14.53) 11.91,14.3 ; v1(12.14,14.53) 12.37,14.3 ; 8.41,20.3 v1(8.64,20.53) ; v1(8.64,20.53) 8.41,20.76 ; v1(8.64,20.53) 8.87,20.3 ; v1(8.64,20.53) 8.87,20.76 ; J7.3 8.87,32.99 ; J7.3 7.64,32.99 ; J7.3 8.87,34.22 ; v1(13.34,11.3) 13.56,11.53 ; v1(13.34,11.3) 13.11,11.53 ; v1(13.34,11.3) 13.56,11.07 ; v1(13.34,11.3) 13.11,11.07 ; v1(10.64,16.53) 10.87,16.76 ; v1(10.64,16.53) 10.41,16.76 ; v1(10.64,16.53) 10.87,16.3 ; v1(10.64,16.53) 10.41,16.3 ; v1(12.14,18.53) 12.37,18.3 ; v1(12.14,18.53) 11.91,18.76 ; v1(12.14,18.53) 12.37,18.76 ; v1(12.14,18.53) 11.91,18.3 ; v1(10.29,24.13) 10.52,24.36 ; v1(10.29,24.13) 10.06,23.9 ; v1(10.29,24.13) 10.06,24.36 ; v1(10.29,24.13) 10.52,23.9 ; v1(9.64,21.03) 9.87,20.8 ; v1(9.64,21.03) 9.41,21.26 ; v1(9.64,21.03) 9.87,21.26 ; v1(9.64,21.03) 9.41,20.8 ; v1(8.26,27.94) 8.48,28.17 ; v1(8.26,27.94) 8.48,27.71 ; v1(8.26,27.94) 8.03,27.71 ; v1(8.26,27.94) 8.03,28.17 ; v1(14.17,4.8) 14.4,5.03 ; v1(14.17,4.8) 14.4,4.57 ; v1(14.17,4.8) 13.94,5.03 ; v1(14.17,4.8) 13.94,4.57 ; 6.91,16.26 v1(7.14,16.03) ; v1(7.14,16.03) 7.37,16.26 ; v1(7.14,16.03) 6.91,15.8 ; v1(7.14,16.03) 7.37,15.8 ; 17.34,16.02 v1(17.56,16.25) ; v1(17.56,16.25) 17.34,16.48 ; v1(17.56,16.25) 17.79,16.02 ; v1(17.56,16.25) 17.79,16.48 ; v1(7.14,18.03) 7.37,17.8 ; v1(7.14,18.03) 6.91,18.26 ; v1(7.14,18.03) 6.91,17.8 ; v1(7.14,18.03) 7.37,18.26 ; v1(11.64,17.03) 11.87,17.26 ; v1(11.64,17.03) 11.87,16.8 ; v1(11.64,17.03) 11.41,17.26 ; v1(11.64,17.03) 11.41,16.8 ; v1(12.45,32.64) 12.67,32.41 ; v1(12.45,32.64) 12.22,32.87 ; v1(12.45,32.64) 12.22,32.41 ; v1(12.45,32.64) 12.67,32.87 ; 7.41,19.26 v1(7.64,19.03) ; v1(7.64,19.03) 7.41,18.8 ; v1(7.64,19.03) 7.87,18.8 ; v1(7.64,19.03) 7.87,19.26 ; v1(8.14,16.53) 8.37,16.76 ; v1(8.14,16.53) 7.91,16.76 ; v1(8.14,16.53) 7.91,16.3 ; v1(8.14,16.53) 8.37,16.3 ; v1(17.56,14.45) 17.79,14.22 ; v1(17.56,14.45) 17.79,14.68 ; v1(17.56,14.45) 17.34,14.68 ; v1(17.56,14.45) 17.34,14.22 ; 9.3,29.31 v1(9.53,29.08) ; v1(9.53,29.08) 9.3,28.85 ; v1(9.53,29.08) 9.75,28.85 ; v1(9.53,29.08) 9.75,29.31 ; 5.82,4.78 v1(6.05,4.55) ; v1(6.05,4.55) 6.27,4.32 ; v1(6.05,4.55) 6.27,4.78 ; v1(6.05,4.55) 5.82,4.32 ; 8.41,20.26 v1(8.64,20.03) ; v1(8.64,20.03) 8.41,19.8 ; v1(8.64,20.03) 8.87,19.8 ; v1(8.64,20.03) 8.87,20.26 ; 7.91,19.3 v1(8.14,19.53) ; v1(8.14,19.53) 8.37,19.76 ; v1(8.14,19.53) 7.91,19.76 ; v1(8.14,19.53) 8.37,19.3 ; v1(9.14,19.53) 9.37,19.3 ; v1(9.14,19.53) 8.91,19.76 ; v1(9.14,19.53) 8.91,19.3 ; v1(9.14,19.53) 9.37,19.76 ; 7.13,12.34 v1(7.36,12.57) ; v1(7.36,12.57) 7.13,12.8 ; v1(7.36,12.57) 7.59,12.34 ; v1(7.36,12.57) 7.59,12.8 ; 7.59,5.79 v1(7.82,5.57) ; v1(7.82,5.57) 7.59,5.34 ; v1(7.82,5.57) 8.05,5.34 ; v1(7.82,5.57) 8.05,5.79 ; v1(6.93,1.76) 7.16,1.98 ; v1(6.93,1.76) 6.71,1.53 ; v1(6.93,1.76) 6.71,1.98 ; v1(6.93,1.76) 7.16,1.53 ; 9.3,28.17 v1(9.53,27.94) ; v1(9.53,27.94) 9.3,27.71 ; v1(9.53,27.94) 9.75,28.17 ; v1(9.53,27.94) 9.75,27.71 ; 9.91,19.3 v1(10.14,19.53) ; v1(10.14,19.53) 9.91,19.76 ; v1(10.14,19.53) 10.37,19.3 ; v1(10.14,19.53) 10.37,19.76 ; 17.34,13.62 v1(17.56,13.85) ; v1(17.56,13.85) 17.79,14.08 ; v1(17.56,13.85) 17.34,14.08 ; v1(17.56,13.85) 17.79,13.62 ; 7.59,3.81 v1(7.82,4.04) ; v1(7.82,4.04) 7.59,4.27 ; v1(7.82,4.04) 8.05,3.81 ; v1(7.82,4.04) 8.05,4.27 ; 8.91,16.3 v1(9.14,16.53) ; v1(9.14,16.53) 9.37,16.3 ; v1(9.14,16.53) 8.91,16.76 ; v1(9.14,16.53) 9.37,16.76 ; v1(12.83,24.64) 13.06,24.41 ; v1(12.83,24.64) 12.6,24.41 ; v1(12.83,24.64) 12.6,24.87 ; v1(12.83,24.64) 13.06,24.87 ; v1(11.14,18.03) 11.37,18.26 ; v1(11.14,18.03) 10.91,18.26 ; v1(11.14,18.03) 11.37,17.8 ; v1(11.14,18.03) 10.91,17.8 ; v1(10.14,18.53) 10.37,18.76 ; v1(10.14,18.53) 10.37,18.3 ; v1(10.14,18.53) 9.91,18.3 ; v1(10.14,18.53) 9.91,18.76 ; v1(11.81,32) 12.04,32.23 ; v1(11.81,32) 12.04,31.78 ; v1(11.81,32) 11.58,31.78 ; v1(11.81,32) 11.58,32.23 ; 7.64,36.76 J7.2 ; J7.2 8.87,35.53 ; J7.2 8.87,36.76 ; 9.41,14.3 v1(9.64,14.53) ; v1(9.64,14.53) 9.87,14.3 ; v1(9.64,14.53) 9.87,14.76 ; v1(9.64,14.53) 9.41,14.76 ; 2.39,31.59 JP1.2 ; JP1.2 3.71,31.59 ; JP1.2 2.39,32.91 ; JP1.2 3.71,32.91 ; v1(8.14,16.03) 8.37,16.26 ; v1(8.14,16.03) 8.37,15.8 ; v1(8.14,16.03) 7.91,15.8 ; v1(8.14,16.03) 7.91,16.26 ; 6.91,21.26 v1(7.14,21.03) ; v1(7.14,21.03) 6.91,20.8 ; v1(7.14,21.03) 7.37,20.8 ; v1(7.14,21.03) 7.37,21.26 ; 17.34,15.42 v1(17.56,15.65) ; v1(17.56,15.65) 17.79,15.42 ; v1(17.56,15.65) 17.79,15.88 ; v1(17.56,15.65) 17.34,15.88 ; 9.91,14.76 v1(10.14,14.53) ; v1(10.14,14.53) 10.37,14.3 ; v1(10.14,14.53) 10.37,14.76 ; v1(10.14,14.53) 9.91,14.3 ; v1(8.64,17.03) 8.87,16.8 ; v1(8.64,17.03) 8.41,16.8 ; v1(8.64,17.03) 8.87,17.26 ; v1(8.64,17.03) 8.41,17.26 ; J3.2 3.72,22.75 ; J3.2 2.4,22.75 ; J3.2 2.4,21.43 ; J3.2 3.72,21.43 ; v1(9.64,16.03) 9.87,16.26 ; v1(9.64,16.03) 9.87,15.8 ; v1(9.64,16.03) 9.41,15.8 ; v1(9.64,16.03) 9.41,16.26 ; v1(10.14,17.53) 10.37,17.76 ; v1(10.14,17.53) 10.37,17.3 ; v1(10.14,17.53) 9.91,17.3 ; v1(10.14,17.53) 9.91,17.76 ; 7.91,18.76 v1(8.14,18.53) ; v1(8.14,18.53) 8.37,18.3 ; v1(8.14,18.53) 8.37,18.76 ; v1(8.14,18.53) 7.91,18.3 ; v1(8.14,17.53) 8.37,17.3 ; v1(8.14,17.53) 7.91,17.3 ; v1(8.14,17.53) 7.91,17.76 ; v1(8.14,17.53) 8.37,17.76 ; v1(8.46,4.8) 8.69,4.57 ; v1(8.46,4.8) 8.23,5.03 ; v1(8.46,4.8) 8.23,4.57 ; v1(8.46,4.8) 8.69,5.03 ; 8.91,14.3 v1(9.14,14.53) ; v1(9.14,14.53) 9.37,14.3 ; v1(9.14,14.53) 8.91,14.76 ; v1(9.14,14.53) 9.37,14.76 ; v1(11.64,19.53) 11.87,19.76 ; v1(11.64,19.53) 11.41,19.76 ; v1(11.64,19.53) 11.41,19.3 ; v1(11.64,19.53) 11.87,19.3 ; v1(11.14,15.53) 11.37,15.76 ; v1(11.14,15.53) 10.91,15.76 ; v1(11.14,15.53) 11.37,15.3 ; v1(11.14,15.53) 10.91,15.3 ; v1(12.4,5.06) 12.62,5.29 ; v1(12.4,5.06) 12.17,4.83 ; v1(12.4,5.06) 12.62,4.83 ; v1(12.4,5.06) 12.17,5.29 ; 12.93,4.32 v1(13.16,4.55) ; v1(13.16,4.55) 12.93,4.78 ; v1(13.16,4.55) 13.39,4.78 ; v1(13.16,4.55) 13.39,4.32 ; 11.91,20.8 v1(12.14,21.03) ; v1(12.14,21.03) 11.91,21.26 ; v1(12.14,21.03) 12.37,20.8 ; v1(12.14,21.03) 12.37,21.26 ; 12.17,4.78 v1(12.4,4.55) ; v1(12.4,4.55) 12.17,4.32 ; v1(12.4,4.55) 12.62,4.78 ; v1(12.4,4.55) 12.62,4.32 ; 7.41,16.8 v1(7.64,17.03) ; v1(7.64,17.03) 7.87,16.8 ; v1(7.64,17.03) 7.41,17.26 ; v1(7.64,17.03) 7.87,17.26 ; 8.41,16.26 v1(8.64,16.03) ; v1(8.64,16.03) 8.87,15.8 ; v1(8.64,16.03) 8.87,16.26 ; v1(8.64,16.03) 8.41,15.8 ; v1(8.26,29.08) 8.48,28.85 ; v1(8.26,29.08) 8.03,29.31 ; v1(8.26,29.08) 8.03,28.85 ; v1(8.26,29.08) 8.48,29.31 ; 8.41,18.8 v1(8.64,19.03) ; v1(8.64,19.03) 8.87,18.8 ; v1(8.64,19.03) 8.87,19.26 ; v1(8.64,19.03) 8.41,19.26 ; 5.11,22.58 v1(5.33,22.35) ; v1(5.33,22.35) 5.56,22.12 ; v1(5.33,22.35) 5.11,22.12 ; v1(5.33,22.35) 5.56,22.58 ; 17.34,17.68 v1(17.56,17.45) ; v1(17.56,17.45) 17.34,17.22 ; v1(17.56,17.45) 17.79,17.22 ; v1(17.56,17.45) 17.79,17.68 ; 5.41,14.3 v1(5.64,14.53) ; v1(5.64,14.53) 5.87,14.3 ; v1(5.64,14.53) 5.41,14.76 ; v1(5.64,14.53) 5.87,14.76 ; v1(10.14,15.03) 10.37,14.8 ; v1(10.14,15.03) 10.37,15.26 ; v1(10.14,15.03) 9.91,14.8 ; v1(10.14,15.03) 9.91,15.26 ; 11.91,15.8 v1(12.14,16.03) ; v1(12.14,16.03) 12.37,15.8 ; v1(12.14,16.03) 11.91,16.26 ; v1(12.14,16.03) 12.37,16.26 ; 10.77,7.24 v1(11,7.47) ; v1(11,7.47) 10.77,7.7 ; v1(11,7.47) 11.23,7.7 ; v1(11,7.47) 11.23,7.24 ; v1(8.14,14.53) 8.37,14.3 ; v1(8.14,14.53) 8.37,14.76 ; v1(8.14,14.53) 7.91,14.3 ; v1(8.14,14.53) 7.91,14.76 ; 17.34,11.22 v1(17.56,11.45) ; v1(17.56,11.45) 17.34,11.68 ; v1(17.56,11.45) 17.79,11.68 ; v1(17.56,11.45) 17.79,11.22 ; v1(6.64,17.03) 6.87,17.26 ; v1(6.64,17.03) 6.41,16.8 ; v1(6.64,17.03) 6.41,17.26 ; v1(6.64,17.03) 6.87,16.8 ; 9.91,16.3 v1(10.14,16.53) ; v1(10.14,16.53) 9.91,16.76 ; v1(10.14,16.53) 10.37,16.76 ; v1(10.14,16.53) 10.37,16.3 ; v1(6.14,18.03) 6.37,18.26 ; v1(6.14,18.03) 5.91,18.26 ; v1(6.14,18.03) 5.91,17.8 ; v1(6.14,18.03) 6.37,17.8 ; 6.41,19.76 v1(6.64,19.53) ; v1(6.64,19.53) 6.41,19.3 ; v1(6.64,19.53) 6.87,19.3 ; v1(6.64,19.53) 6.87,19.76 ; v1(11.14,20.53) 11.37,20.3 ; v1(11.14,20.53) 11.37,20.76 ; v1(11.14,20.53) 10.91,20.76 ; v1(11.14,20.53) 10.91,20.3 ; v1(13.28,1.76) 13.51,1.53 ; v1(13.28,1.76) 13.51,1.98 ; v1(13.28,1.76) 13.06,1.98 ; v1(13.28,1.76) 13.06,1.53 ; v1(6.81,5.06) 7.04,5.29 ; v1(6.81,5.06) 7.04,4.83 ; v1(6.81,5.06) 6.58,4.83 ; v1(6.81,5.06) 6.58,5.29 ; 8.41,15.3 v1(8.64,15.53) ; v1(8.64,15.53) 8.87,15.3 ; v1(8.64,15.53) 8.87,15.76 ; v1(8.64,15.53) 8.41,15.76 ; 9.41,17.26 v1(9.64,17.03) ; v1(9.64,17.03) 9.87,17.26 ; v1(9.64,17.03) 9.41,16.8 ; v1(9.64,17.03) 9.87,16.8 ; 12.47,29.06 v1(12.7,28.83) ; v1(12.7,28.83) 12.47,28.6 ; v1(12.7,28.83) 12.93,29.06 ; v1(12.7,28.83) 12.93,28.6 ; v1(14.17,4.04) 14.4,3.81 ; v1(14.17,4.04) 14.4,4.27 ; v1(14.17,4.04) 13.94,4.27 ; v1(14.17,4.04) 13.94,3.81 ; 17.34,15.28 v1(17.56,15.05) ; v1(17.56,15.05) 17.79,15.28 ; v1(17.56,15.05) 17.79,14.82 ; v1(17.56,15.05) 17.34,14.82 ; 7.41,14.8 v1(7.64,15.03) ; v1(7.64,15.03) 7.87,14.8 ; v1(7.64,15.03) 7.41,15.26 ; v1(7.64,15.03) 7.87,15.26 ; 5.41,21.26 v1(5.64,21.03) ; v1(5.64,21.03) 5.87,21.26 ; v1(5.64,21.03) 5.87,20.8 ; v1(5.64,21.03) 5.41,20.8 ; v1(17.56,12.05) 17.79,11.82 ; v1(17.56,12.05) 17.79,12.28 ; v1(17.56,12.05) 17.34,12.28 ; v1(17.56,12.05) 17.34,11.82 ; 5.91,20.3 v1(6.14,20.53) ; v1(6.14,20.53) 6.37,20.3 ; v1(6.14,20.53) 5.91,20.76 ; v1(6.14,20.53) 6.37,20.76 ; 5.41,19.26 v1(5.64,19.03) ; v1(5.64,19.03) 5.41,18.8 ; v1(5.64,19.03) 5.87,19.26 ; v1(5.64,19.03) 5.87,18.8 ; v1(6.05,5.06) 6.27,5.29 ; v1(6.05,5.06) 5.82,5.29 ; v1(6.05,5.06) 6.27,4.83 ; v1(6.05,5.06) 5.82,4.83 ; 8.91,16.8 v1(9.14,17.03) ; v1(9.14,17.03) 9.37,16.8 ; v1(9.14,17.03) 9.37,17.26 ; v1(9.14,17.03) 8.91,17.26 ; 5.91,15.76 v1(6.14,15.53) ; v1(6.14,15.53) 5.91,15.3 ; v1(6.14,15.53) 6.37,15.3 ; v1(6.14,15.53) 6.37,15.76 ; v1(9.64,20.03) 9.87,19.8 ; v1(9.64,20.03) 9.41,20.26 ; v1(9.64,20.03) 9.87,20.26 ; v1(9.64,20.03) 9.41,19.8 ; 12.93,4.83 v1(13.16,5.06) ; v1(13.16,5.06) 12.93,5.29 ; v1(13.16,5.06) 13.39,5.29 ; v1(13.16,5.06) 13.39,4.83 ; v1(9.64,18.03) 9.87,18.26 ; v1(9.64,18.03) 9.87,17.8 ; v1(9.64,18.03) 9.41,17.8 ; v1(9.64,18.03) 9.41,18.26 ; v1(9.53,26.8) 9.75,26.57 ; v1(9.53,26.8) 9.3,27.03 ; v1(9.53,26.8) 9.75,27.03 ; v1(9.53,26.8) 9.3,26.57 ; 5.49,26.19 v1(5.71,26.42) ; v1(5.71,26.42) 5.49,26.64 ; v1(5.71,26.42) 5.94,26.64 ; v1(5.71,26.42) 5.94,26.19 ; v1(17.56,13.25) 17.79,13.02 ; v1(17.56,13.25) 17.34,13.02 ; v1(17.56,13.25) 17.34,13.48 ; v1(17.56,13.25) 17.79,13.48 ; 10.17,32.99 J8.4 ; J8.4 11.4,32.99 ; J8.4 10.17,34.22 ; J7.4 6.33,32.99 ; J7.4 5.1,32.99 ; J7.4 5.1,34.22 ; 17.34,16.62 v1(17.56,16.85) ; v1(17.56,16.85) 17.79,17.08 ; v1(17.56,16.85) 17.79,16.62 ; v1(17.56,16.85) 17.34,17.08 ; v1(5.33,23.11) 5.56,22.89 ; v1(5.33,23.11) 5.11,22.89 ; v1(5.33,23.11) 5.11,23.34 ; v1(5.33,23.11) 5.56,23.34 ; 8.03,27.03 v1(8.26,26.8) ; v1(8.26,26.8) 8.48,26.57 ; v1(8.26,26.8) 8.48,27.03 ; v1(8.26,26.8) 8.03,26.57 ; v1(17.56,12.65) 17.79,12.42 ; v1(17.56,12.65) 17.79,12.88 ; v1(17.56,12.65) 17.34,12.88 ; v1(17.56,12.65) 17.34,12.42 ; v1(7.64,18.03) 7.87,17.8 ; v1(7.64,18.03) 7.41,18.26 ; v1(7.64,18.03) 7.41,17.8 ; v1(7.64,18.03) 7.87,18.26 ; 17.79,17.82 v1(17.56,18.05) 17.34,17.82 ; 17.11,5.12 v1(17.34,5.35) ; v1(17.34,5.35) 17.57,5.58 ; v1(17.34,5.35) 17.57,5.12 ; v1(17.34,5.35) 17.11,5.58 ; v1(5.64,16.53) 5.87,16.3 ; v1(5.64,16.53) 5.41,16.3 ; v1(5.64,16.53) 5.41,16.76 ; v1(5.64,16.53) 5.87,16.76 ; v1(7.14,18.53) 7.37,18.76 ; v1(7.14,18.53) 7.37,18.3 ; v1(7.14,18.53) 6.91,18.76 ; v1(7.14,18.53) 6.91,18.3 ; v1(6.81,4.55) 7.04,4.32 ; v1(6.81,4.55) 6.58,4.32 ; v1(6.81,4.55) 7.04,4.78 ; v1(6.81,4.55) 6.58,4.78 ; v1(10.14,16.03) 10.37,15.8 ; v1(10.14,16.03) 9.91,16.26 ; v1(10.14,16.03) 9.91,15.8 ; v1(10.14,16.03) 10.37,16.26 ; v1(9.64,19.03) 9.87,19.26 ; v1(9.64,19.03) 9.41,18.8 ; v1(9.64,19.03) 9.41,19.26 ; v1(9.64,19.03) 9.87,18.8 ; 10.06,11.08 v1(10.29,11.31) ; v1(10.29,11.31) 10.52,11.08 ; v1(10.29,11.31) 10.52,11.54 ; v1(10.29,11.31) 10.06,11.54 ; v1(10.64,19.03) 10.87,18.8 ; v1(10.64,19.03) 10.41,18.8 ; v1(10.64,19.03) 10.87,19.26 ; v1(10.64,19.03) 10.41,19.26 ; 13.32,32.76 J8.3 12.71,32.99 ; J7.5 6.33,36.76 ; J7.5 5.1,36.76 ; J7.5 5.1,35.53 ; v1(14.17,5.57) 14.4,5.34 ; v1(14.17,5.57) 13.94,5.79 ; v1(14.17,5.57) 14.4,5.79 ; v1(14.17,5.57) 13.94,5.34 ; 12.71,36.76 J8.2 13.32,35.3
  07_GND w0.254: v1(9.53,29.08) 9.75,29.31 ; v1(9.53,29.08) 9.3,28.85 ; v1(9.53,29.08) 9.75,28.85 ; v1(9.53,29.08) 9.3,29.31 ; 8.41,20.26 v1(8.64,20.03) ; v1(8.64,20.03) 8.87,20.26 ; v1(8.64,20.03) 8.41,19.8 ; v1(8.64,20.03) 8.87,19.8 ; 11.41,19.76 v1(11.64,19.53) ; v1(11.64,19.53) 11.87,19.76 ; v1(11.64,19.53) 11.87,19.3 ; v1(11.64,19.53) 11.41,19.3 ; 11.58,32.23 v1(11.81,32) ; v1(11.81,32) 11.58,31.78 ; v1(11.81,32) 12.04,31.78 ; v1(11.81,32) 12.04,32.23 ; 7.41,17.8 v1(7.64,18.03) ; v1(7.64,18.03) 7.87,17.8 ; v1(7.64,18.03) 7.87,18.26 ; v1(7.64,18.03) 7.41,18.26 ; 7.91,17.76 v1(8.14,17.53) ; v1(8.14,17.53) 7.91,17.3 ; v1(8.14,17.53) 8.37,17.3 ; v1(8.14,17.53) 8.37,17.76 ; 17.11,5.58 v1(17.34,5.35) ; v1(17.34,5.35) 17.57,5.12 ; v1(17.34,5.35) 17.11,5.12 ; v1(17.34,5.35) 17.57,5.58 ; 10.41,16.3 v1(10.64,16.53) ; v1(10.64,16.53) 10.41,16.76 ; v1(10.64,16.53) 10.87,16.3 ; v1(10.64,16.53) 10.87,16.76 ; v1(12.14,18.53) 12.37,18.76 ; v1(12.14,18.53) 12.37,18.3 ; v1(12.14,18.53) 11.91,18.76 ; v1(12.14,18.53) 11.91,18.3 ; v1(12.7,28.83) 12.93,29.06 ; v1(12.7,28.83) 12.93,28.6 ; v1(12.7,28.83) 12.47,28.6 ; v1(12.7,28.83) 12.47,29.06 ; v1(5.33,23.11) 5.56,23.34 ; v1(5.33,23.11) 5.56,22.89 ; v1(5.33,23.11) 5.11,23.34 ; v1(5.33,23.11) 5.11,22.89 ; v1(12.14,14.53) 12.37,14.3 ; v1(12.14,14.53) 12.37,14.76 ; v1(12.14,14.53) 11.91,14.76 ; v1(12.14,14.53) 11.91,14.3 ; 7.41,17.26 v1(7.64,17.03) ; v1(7.64,17.03) 7.41,16.8 ; v1(7.64,17.03) 7.87,16.8 ; v1(7.64,17.03) 7.87,17.26 ; 6.91,17.8 v1(7.14,18.03) ; v1(7.14,18.03) 6.91,18.26 ; v1(7.14,18.03) 7.37,18.26 ; v1(7.14,18.03) 7.37,17.8 ; v1(14.17,5.57) 14.4,5.79 ; v1(14.17,5.57) 13.94,5.34 ; v1(14.17,5.57) 13.94,5.79 ; v1(14.17,5.57) 14.4,5.34 ; v1(8.64,15.53) 8.87,15.3 ; v1(8.64,15.53) 8.87,15.76 ; v1(8.64,15.53) 8.41,15.76 ; v1(8.64,15.53) 8.41,15.3 ; v1(10.29,24.13) 10.52,24.36 ; v1(10.29,24.13) 10.52,23.9 ; v1(10.29,24.13) 10.06,23.9 ; v1(10.29,24.13) 10.06,24.36 ; 7.41,19.26 v1(7.64,19.03) ; v1(7.64,19.03) 7.87,19.26 ; v1(7.64,19.03) 7.87,18.8 ; v1(7.64,19.03) 7.41,18.8 ; 7.91,18.3 v1(8.14,18.53) ; v1(8.14,18.53) 8.37,18.76 ; v1(8.14,18.53) 7.91,18.76 ; v1(8.14,18.53) 8.37,18.3 ; v1(12.4,4.55) 12.62,4.32 ; v1(12.4,4.55) 12.17,4.78 ; v1(12.4,4.55) 12.17,4.32 ; v1(12.4,4.55) 12.62,4.78 ; v1(7.82,5.57) 8.05,5.79 ; v1(7.82,5.57) 7.59,5.34 ; v1(7.82,5.57) 7.59,5.79 ; v1(7.82,5.57) 8.05,5.34 ; 5.41,16.76 v1(5.64,16.53) ; v1(5.64,16.53) 5.87,16.3 ; v1(5.64,16.53) 5.87,16.76 ; v1(5.64,16.53) 5.41,16.3 ; 7.13,12.8 v1(7.36,12.57) ; v1(7.36,12.57) 7.59,12.8 ; v1(7.36,12.57) 7.59,12.34 ; v1(7.36,12.57) 7.13,12.34 ; 9.41,17.26 v1(9.64,17.03) ; v1(9.64,17.03) 9.41,16.8 ; v1(9.64,17.03) 9.87,16.8 ; v1(9.64,17.03) 9.87,17.26 ; JP1.2 3.71,31.59 ; JP1.2 2.39,32.91 ; JP1.2 3.71,32.91 ; JP1.2 2.39,31.59 ; v1(11.14,20.53) 11.37,20.76 ; v1(11.14,20.53) 11.37,20.3 ; v1(11.14,20.53) 10.91,20.3 ; v1(11.14,20.53) 10.91,20.76 ; v1(8.46,4.8) 8.69,5.03 ; v1(8.46,4.8) 8.69,4.57 ; v1(8.46,4.8) 8.23,5.03 ; v1(8.46,4.8) 8.23,4.57 ; 17.34,11.68 v1(17.56,11.45) ; v1(17.56,11.45) 17.79,11.68 ; v1(17.56,11.45) 17.34,11.22 ; v1(17.56,11.45) 17.79,11.22 ; v1(17.56,13.25) 17.79,13.48 ; v1(17.56,13.25) 17.34,13.02 ; v1(17.56,13.25) 17.34,13.48 ; v1(17.56,13.25) 17.79,13.02 ; 7.91,19.3 v1(8.14,19.53) ; v1(8.14,19.53) 8.37,19.3 ; v1(8.14,19.53) 7.91,19.76 ; v1(8.14,19.53) 8.37,19.76 ; v1(14.17,4.04) 14.4,3.81 ; v1(14.17,4.04) 13.94,3.81 ; v1(14.17,4.04) 13.94,4.27 ; v1(14.17,4.04) 14.4,4.27 ; v1(9.64,21.03) 9.87,20.8 ; v1(9.64,21.03) 9.41,21.26 ; v1(9.64,21.03) 9.41,20.8 ; v1(9.64,21.03) 9.87,21.26 ; 9.41,15.8 v1(9.64,16.03) ; v1(9.64,16.03) 9.41,16.26 ; v1(9.64,16.03) 9.87,16.26 ; v1(9.64,16.03) 9.87,15.8 ; 12.93,4.83 v1(13.16,5.06) ; v1(13.16,5.06) 13.39,4.83 ; v1(13.16,5.06) 13.39,5.29 ; v1(13.16,5.06) 12.93,5.29 ; 8.41,17.26 v1(8.64,17.03) ; v1(8.64,17.03) 8.87,16.8 ; v1(8.64,17.03) 8.87,17.26 ; v1(8.64,17.03) 8.41,16.8 ; 13.94,5.03 v1(14.17,4.8) ; v1(14.17,4.8) 14.4,4.57 ; v1(14.17,4.8) 14.4,5.03 ; v1(14.17,4.8) 13.94,4.57 ; v1(5.64,21.03) 5.87,20.8 ; v1(5.64,21.03) 5.41,20.8 ; v1(5.64,21.03) 5.87,21.26 ; v1(5.64,21.03) 5.41,21.26 ; v1(5.64,14.53) 5.87,14.76 ; v1(5.64,14.53) 5.41,14.3 ; v1(5.64,14.53) 5.41,14.76 ; v1(5.64,14.53) 5.87,14.3 ; v1(10.14,18.53) 10.37,18.3 ; v1(10.14,18.53) 10.37,18.76 ; v1(10.14,18.53) 9.91,18.3 ; v1(10.14,18.53) 9.91,18.76 ; 8.03,28.17 v1(8.26,27.94) ; v1(8.26,27.94) 8.48,27.71 ; v1(8.26,27.94) 8.48,28.17 ; v1(8.26,27.94) 8.03,27.71 ; v1(17.56,17.45) 17.79,17.68 ; v1(17.56,17.45) 17.34,17.22 ; v1(17.56,17.45) 17.34,17.68 ; v1(17.56,17.45) 17.79,17.22 ; 5.49,26.64 v1(5.71,26.42) ; v1(5.71,26.42) 5.94,26.64 ; v1(5.71,26.42) 5.94,26.19 ; v1(5.71,26.42) 5.49,26.19 ; 17.34,14.82 v1(17.56,15.05) ; v1(17.56,15.05) 17.79,14.82 ; v1(17.56,15.05) 17.34,15.28 ; v1(17.56,15.05) 17.79,15.28 ; v1(9.53,27.94) 9.75,28.17 ; v1(9.53,27.94) 9.75,27.71 ; v1(9.53,27.94) 9.3,28.17 ; v1(9.53,27.94) 9.3,27.71 ; 5.91,18.26 v1(6.14,18.03) ; v1(6.14,18.03) 6.37,18.26 ; v1(6.14,18.03) 6.37,17.8 ; v1(6.14,18.03) 5.91,17.8 ; v1(9.64,19.03) 9.87,19.26 ; v1(9.64,19.03) 9.41,18.8 ; v1(9.64,19.03) 9.41,19.26 ; v1(9.64,19.03) 9.87,18.8 ; v1(10.14,17.53) 10.37,17.76 ; v1(10.14,17.53) 10.37,17.3 ; v1(10.14,17.53) 9.91,17.76 ; v1(10.14,17.53) 9.91,17.3 ; 11.41,16.8 v1(11.64,17.03) ; v1(11.64,17.03) 11.87,17.26 ; v1(11.64,17.03) 11.41,17.26 ; v1(11.64,17.03) 11.87,16.8 ; v1(9.64,20.03) 9.87,19.8 ; v1(9.64,20.03) 9.41,20.26 ; v1(9.64,20.03) 9.41,19.8 ; v1(9.64,20.03) 9.87,20.26 ; 10.06,11.54 v1(10.29,11.31) ; v1(10.29,11.31) 10.52,11.54 ; v1(10.29,11.31) 10.52,11.08 ; v1(10.29,11.31) 10.06,11.08 ; 7.91,16.76 v1(8.14,16.53) ; v1(8.14,16.53) 8.37,16.3 ; v1(8.14,16.53) 8.37,16.76 ; v1(8.14,16.53) 7.91,16.3 ; 10.41,18.8 v1(10.64,19.03) ; v1(10.64,19.03) 10.87,18.8 ; v1(10.64,19.03) 10.87,19.26 ; v1(10.64,19.03) 10.41,19.26 ; v1(17.56,16.85) 17.79,17.08 ; v1(17.56,16.85) 17.34,16.62 ; v1(17.56,16.85) 17.79,16.62 ; v1(17.56,16.85) 17.34,17.08 ; 7.91,15.8 v1(8.14,16.03) ; v1(8.14,16.03) 7.91,16.26 ; v1(8.14,16.03) 8.37,16.26 ; v1(8.14,16.03) 8.37,15.8 ; v1(6.05,4.55) 6.27,4.78 ; v1(6.05,4.55) 5.82,4.78 ; v1(6.05,4.55) 6.27,4.32 ; v1(6.05,4.55) 5.82,4.32 ; 9.91,16.26 v1(10.14,16.03) ; v1(10.14,16.03) 10.37,15.8 ; v1(10.14,16.03) 9.91,15.8 ; v1(10.14,16.03) 10.37,16.26 ; v1(17.56,13.85) 17.79,14.08 ; v1(17.56,13.85) 17.34,14.08 ; v1(17.56,13.85) 17.34,13.62 ; v1(17.56,13.85) 17.79,13.62 ; 8.91,19.76 v1(9.14,19.53) ; v1(9.14,19.53) 9.37,19.76 ; v1(9.14,19.53) 9.37,19.3 ; v1(9.14,19.53) 8.91,19.3 ; v1(8.64,20.53) 8.87,20.3 ; v1(8.64,20.53) 8.87,20.76 ; v1(8.64,20.53) 8.41,20.76 ; v1(8.64,20.53) 8.41,20.3 ; 17.34,17.82 v1(17.56,18.05) ; v1(17.56,18.05) 17.34,18.28 ; v1(17.56,18.05) 17.79,18.28 ; v1(17.56,18.05) 17.79,17.82 ; 6.71,1.98 v1(6.93,1.76) ; v1(6.93,1.76) 6.71,1.53 ; v1(6.93,1.76) 7.16,1.98 ; v1(6.93,1.76) 7.16,1.53 ; v1(9.53,26.8) 9.75,27.03 ; v1(9.53,26.8) 9.3,26.57 ; v1(9.53,26.8) 9.3,27.03 ; v1(9.53,26.8) 9.75,26.57 ; v1(11,7.47) 11.23,7.7 ; v1(11,7.47) 11.23,7.24 ; v1(11,7.47) 10.77,7.24 ; v1(11,7.47) 10.77,7.7 ; 5.41,19.26 v1(5.64,19.03) ; v1(5.64,19.03) 5.41,18.8 ; v1(5.64,19.03) 5.87,18.8 ; v1(5.64,19.03) 5.87,19.26 ; 12.22,32.87 v1(12.45,32.64) ; v1(12.45,32.64) 12.67,32.41 ; v1(12.45,32.64) 12.22,32.41 ; v1(12.45,32.64) 12.67,32.87 ; 17.34,16.02 v1(17.56,16.25) ; v1(17.56,16.25) 17.34,16.48 ; v1(17.56,16.25) 17.79,16.48 ; v1(17.56,16.25) 17.79,16.02 ; 5.91,15.76 v1(6.14,15.53) ; v1(6.14,15.53) 6.37,15.3 ; v1(6.14,15.53) 6.37,15.76 ; v1(6.14,15.53) 5.91,15.3 ; 10.17,34.22 J8.4 ; J8.4 10.17,32.99 ; J8.4 11.4,32.99 ; J7.3 8.87,32.99 ; J7.3 8.87,34.22 ; J7.3 7.64,32.99 ; 6.91,20.8 v1(7.14,21.03) ; v1(7.14,21.03) 6.91,21.26 ; v1(7.14,21.03) 7.37,20.8 ; v1(7.14,21.03) 7.37,21.26 ; 5.1,32.99 J7.4 ; J7.4 5.1,34.22 ; J7.4 6.33,32.99 ; v1(9.14,14.53) 9.37,14.3 ; v1(9.14,14.53) 9.37,14.76 ; v1(9.14,14.53) 8.91,14.3 ; v1(9.14,14.53) 8.91,14.76 ; 12.6,24.87 v1(12.83,24.64) ; v1(12.83,24.64) 12.6,24.41 ; v1(12.83,24.64) 13.06,24.87 ; v1(12.83,24.64) 13.06,24.41 ; J3.2 3.72,21.43 ; J3.2 2.4,22.75 ; J3.2 3.72,22.75 ; J3.2 2.4,21.43 ; 8.03,26.57 v1(8.26,26.8) ; v1(8.26,26.8) 8.48,26.57 ; v1(8.26,26.8) 8.48,27.03 ; v1(8.26,26.8) 8.03,27.03 ; 11.91,21.26 v1(12.14,21.03) ; v1(12.14,21.03) 12.37,20.8 ; v1(12.14,21.03) 11.91,20.8 ; v1(12.14,21.03) 12.37,21.26 ; v1(9.64,18.03) 9.87,18.26 ; v1(9.64,18.03) 9.41,18.26 ; v1(9.64,18.03) 9.41,17.8 ; v1(9.64,18.03) 9.87,17.8 ; v1(7.14,16.03) 7.37,16.26 ; v1(7.14,16.03) 6.91,15.8 ; v1(7.14,16.03) 6.91,16.26 ; v1(7.14,16.03) 7.37,15.8 ; 6.58,4.32 v1(6.81,4.55) ; v1(6.81,4.55) 7.04,4.32 ; v1(6.81,4.55) 7.04,4.78 ; v1(6.81,4.55) 6.58,4.78 ; 8.03,28.85 v1(8.26,29.08) ; v1(8.26,29.08) 8.03,29.31 ; v1(8.26,29.08) 8.48,29.31 ; v1(8.26,29.08) 8.48,28.85 ; 9.91,19.3 v1(10.14,19.53) ; v1(10.14,19.53) 10.37,19.3 ; v1(10.14,19.53) 10.37,19.76 ; v1(10.14,19.53) 9.91,19.76 ; 7.41,14.8 v1(7.64,15.03) ; v1(7.64,15.03) 7.87,14.8 ; v1(7.64,15.03) 7.41,15.26 ; v1(7.64,15.03) 7.87,15.26 ; 9.91,16.3 v1(10.14,16.53) ; v1(10.14,16.53) 10.37,16.3 ; v1(10.14,16.53) 10.37,16.76 ; v1(10.14,16.53) 9.91,16.76 ; v1(12.4,5.06) 12.62,4.83 ; v1(12.4,5.06) 12.17,4.83 ; v1(12.4,5.06) 12.62,5.29 ; v1(12.4,5.06) 12.17,5.29 ; v1(17.56,12.05) 17.79,12.28 ; v1(17.56,12.05) 17.79,11.82 ; v1(17.56,12.05) 17.34,12.28 ; v1(17.56,12.05) 17.34,11.82 ; v1(9.14,17.03) 9.37,16.8 ; v1(9.14,17.03) 8.91,16.8 ; v1(9.14,17.03) 8.91,17.26 ; v1(9.14,17.03) 9.37,17.26 ; v1(10.14,14.53) 10.37,14.76 ; v1(10.14,14.53) 10.37,14.3 ; v1(10.14,14.53) 9.91,14.3 ; v1(10.14,14.53) 9.91,14.76 ; 17.34,12.42 v1(17.56,12.65) ; v1(17.56,12.65) 17.79,12.88 ; v1(17.56,12.65) 17.34,12.88 ; v1(17.56,12.65) 17.79,12.42 ; 8.41,15.8 v1(8.64,16.03) ; v1(8.64,16.03) 8.87,15.8 ; v1(8.64,16.03) 8.41,16.26 ; v1(8.64,16.03) 8.87,16.26 ; 7.91,14.76 v1(8.14,14.53) ; v1(8.14,14.53) 8.37,14.76 ; v1(8.14,14.53) 7.91,14.3 ; v1(8.14,14.53) 8.37,14.3 ; v1(17.56,14.45) 17.79,14.68 ; v1(17.56,14.45) 17.34,14.68 ; v1(17.56,14.45) 17.79,14.22 ; v1(17.56,14.45) 17.34,14.22 ; 7.64,36.76 J7.2 ; J7.2 8.87,35.53 ; J7.2 8.87,36.76 ; v1(17.56,15.65) 17.79,15.88 ; v1(17.56,15.65) 17.79,15.42 ; v1(17.56,15.65) 17.34,15.88 ; v1(17.56,15.65) 17.34,15.42 ; v1(13.28,1.76) 13.51,1.98 ; v1(13.28,1.76) 13.06,1.98 ; v1(13.28,1.76) 13.06,1.53 ; v1(13.28,1.76) 13.51,1.53 ; 9.91,15.26 v1(10.14,15.03) ; v1(10.14,15.03) 9.91,14.8 ; v1(10.14,15.03) 10.37,14.8 ; v1(10.14,15.03) 10.37,15.26 ; 13.11,11.07 v1(13.34,11.3) ; v1(13.34,11.3) 13.11,11.53 ; v1(13.34,11.3) 13.56,11.53 ; v1(13.34,11.3) 13.56,11.07 ; 5.11,22.12 v1(5.33,22.35) ; v1(5.33,22.35) 5.56,22.12 ; v1(5.33,22.35) 5.56,22.58 ; v1(5.33,22.35) 5.11,22.58 ; v1(6.64,19.53) 6.87,19.3 ; v1(6.64,19.53) 6.41,19.76 ; v1(6.64,19.53) 6.41,19.3 ; v1(6.64,19.53) 6.87,19.76 ; 10.17,36.76 J8.5 ; J8.5 11.4,36.76 ; J8.5 10.17,35.53 ; 10.91,15.3 v1(11.14,15.53) ; v1(11.14,15.53) 10.91,15.76 ; v1(11.14,15.53) 11.37,15.3 ; v1(11.14,15.53) 11.37,15.76 ; v1(9.14,16.53) 9.37,16.3 ; v1(9.14,16.53) 9.37,16.76 ; v1(9.14,16.53) 8.91,16.3 ; v1(9.14,16.53) 8.91,16.76 ; v1(7.14,18.53) 7.37,18.76 ; v1(7.14,18.53) 6.91,18.76 ; v1(7.14,18.53) 6.91,18.3 ; v1(7.14,18.53) 7.37,18.3 ; v1(8.64,19.03) 8.87,19.26 ; v1(8.64,19.03) 8.41,18.8 ; v1(8.64,19.03) 8.41,19.26 ; v1(8.64,19.03) 8.87,18.8 ; 7.59,3.81 v1(7.82,4.04) ; v1(7.82,4.04) 7.59,4.27 ; v1(7.82,4.04) 8.05,3.81 ; v1(7.82,4.04) 8.05,4.27 ; J8.2 13.94,35.53 ; J8.2 13.94,36.76 ; J8.2 12.71,36.76 ; 9.41,14.76 v1(9.64,14.53) ; v1(9.64,14.53) 9.87,14.3 ; v1(9.64,14.53) 9.41,14.3 ; v1(9.64,14.53) 9.87,14.76 ; v1(11.14,18.03) 11.37,18.26 ; v1(11.14,18.03) 11.37,17.8 ; v1(11.14,18.03) 10.91,18.26 ; v1(11.14,18.03) 10.91,17.8 ; 5.1,35.53 J7.5 ; J7.5 5.1,36.76 ; J7.5 6.33,36.76 ; 12.93,4.78 v1(13.16,4.55) ; v1(13.16,4.55) 13.39,4.32 ; v1(13.16,4.55) 12.93,4.32 ; v1(13.16,4.55) 13.39,4.78 ; v1(6.81,5.06) 7.04,4.83 ; v1(6.81,5.06) 7.04,5.29 ; v1(6.81,5.06) 6.58,5.29 ; v1(6.81,5.06) 6.58,4.83 ; v1(6.64,17.03) 6.87,16.8 ; v1(6.64,17.03) 6.41,16.8 ; v1(6.64,17.03) 6.87,17.26 ; v1(6.64,17.03) 6.41,17.26 ; 5.82,4.83 v1(6.05,5.06) ; v1(6.05,5.06) 6.27,4.83 ; v1(6.05,5.06) 5.82,5.29 ; v1(6.05,5.06) 6.27,5.29 ; v1(12.14,16.03) 12.37,15.8 ; v1(12.14,16.03) 11.91,15.8 ; v1(12.14,16.03) 12.37,16.26 ; v1(12.14,16.03) 11.91,16.26 ; 5.91,20.76 v1(6.14,20.53) ; v1(6.14,20.53) 6.37,20.76 ; v1(6.14,20.53) 5.91,20.3 ; v1(6.14,20.53) 6.37,20.3 ; J8.3 13.94,34.22 ; J8.3 13.94,32.99 ; J8.3 12.71,32.99
  BOTTOM w0.254: v1(12.14,16.03) 12.56,16.03 12.71,15.88 C37.1 ; U1.20 7.86,28.69 v1(8.26,29.08) 8.64,29.47 U1.25 ; v1(8.26,26.8) 8.26,26.38 8.14,26.27 U1.13 ; v1(8.26,26.8) 8.64,26.41 U1.12 ; v1(8.26,26.8) 7.64,26.18 U1.14 ; C39.2 v1(11,7.47) ; v1(7.82,5.57) C41.1 v1(8.46,4.8) C43.1 v1(7.82,4.04) ; C33.1 v1(10.29,24.13) 9.53,24.13 C34.1 9.02,23.62 C35.2 ; v1(9.53,27.94) 9.77,28.19 U1.4 ; v1(9.53,26.8) 9.14,26.41 U1.11 ; v1(9.53,26.8) 9.53,26.38 9.64,26.27 U1.10 ; v1(9.53,26.8) 10.14,26.18 U1.9 ; J7.4 5.33,33.23 C27.2 ; R7.1 11.77,32.04 v1(11.81,32) C26.1 v1(12.45,32.64) ; R24.2 v1(13.28,1.76) ; v1(12.4,5.06) 12.13,5.33 U4.4 ; v1(12.83,24.64) 13.24,24.64 13.25,24.63 R17.1 ; v1(14.17,4.04) C42.1 14.81,4.17 v1(14.17,4.8) 14.81,5.44 C40.1 v1(14.17,5.57) ; U3.4 v1(7.36,12.57) ; U1.26 9.14,29.47 v1(9.53,29.08) ; v1(17.34,5.35) 16.5,4.52 C31.2 17.17,3.78 R12.1 ; C30.1 v1(12.7,28.83) C29.1 ; v1(12.14,21.03) 13.47,21.03 13.47,21.03 R9.2 ; C38.1 v1(13.34,11.3) ; R26.2 v1(6.93,1.76) ; U5.4 5.78,5.33 v1(6.05,5.06) ; v1(5.33,23.11) v1(5.33,22.35)
